# Altium PCB PCB1.PcbDoc
Units mm, origin at the board's own origin, x right, y up, seen from the top; angles counter-clockwise.
Board outline 68.06 x 85.84 mm, 2 copper layers (Top Layer, Bottom Layer); 11 components, 14 nets, 81 pads, 0 vias.
Unrouted connection lines stored in the file: 3.
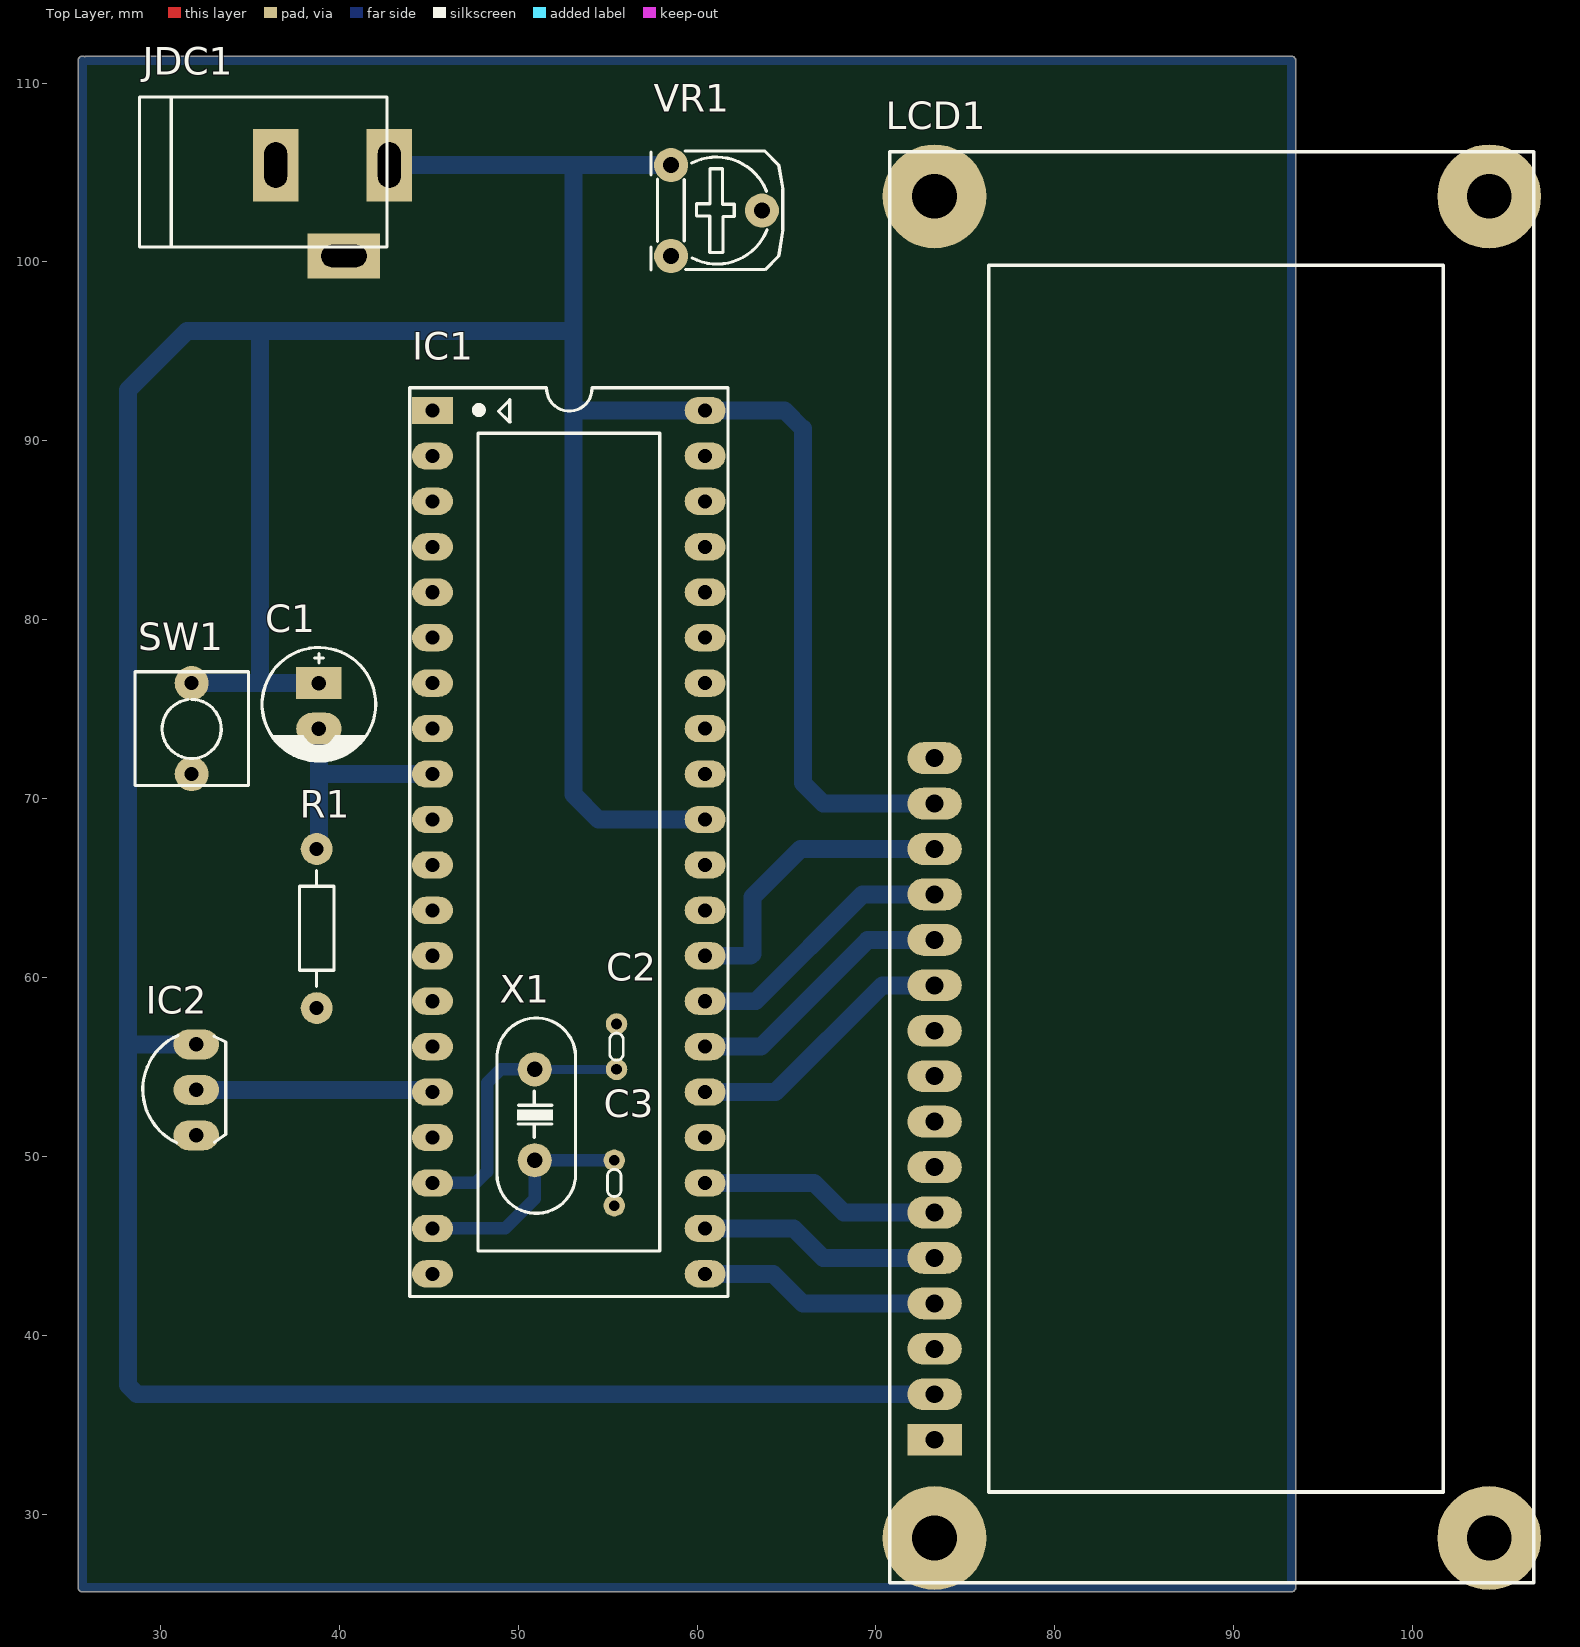
[diagram p0: Top Layer view]
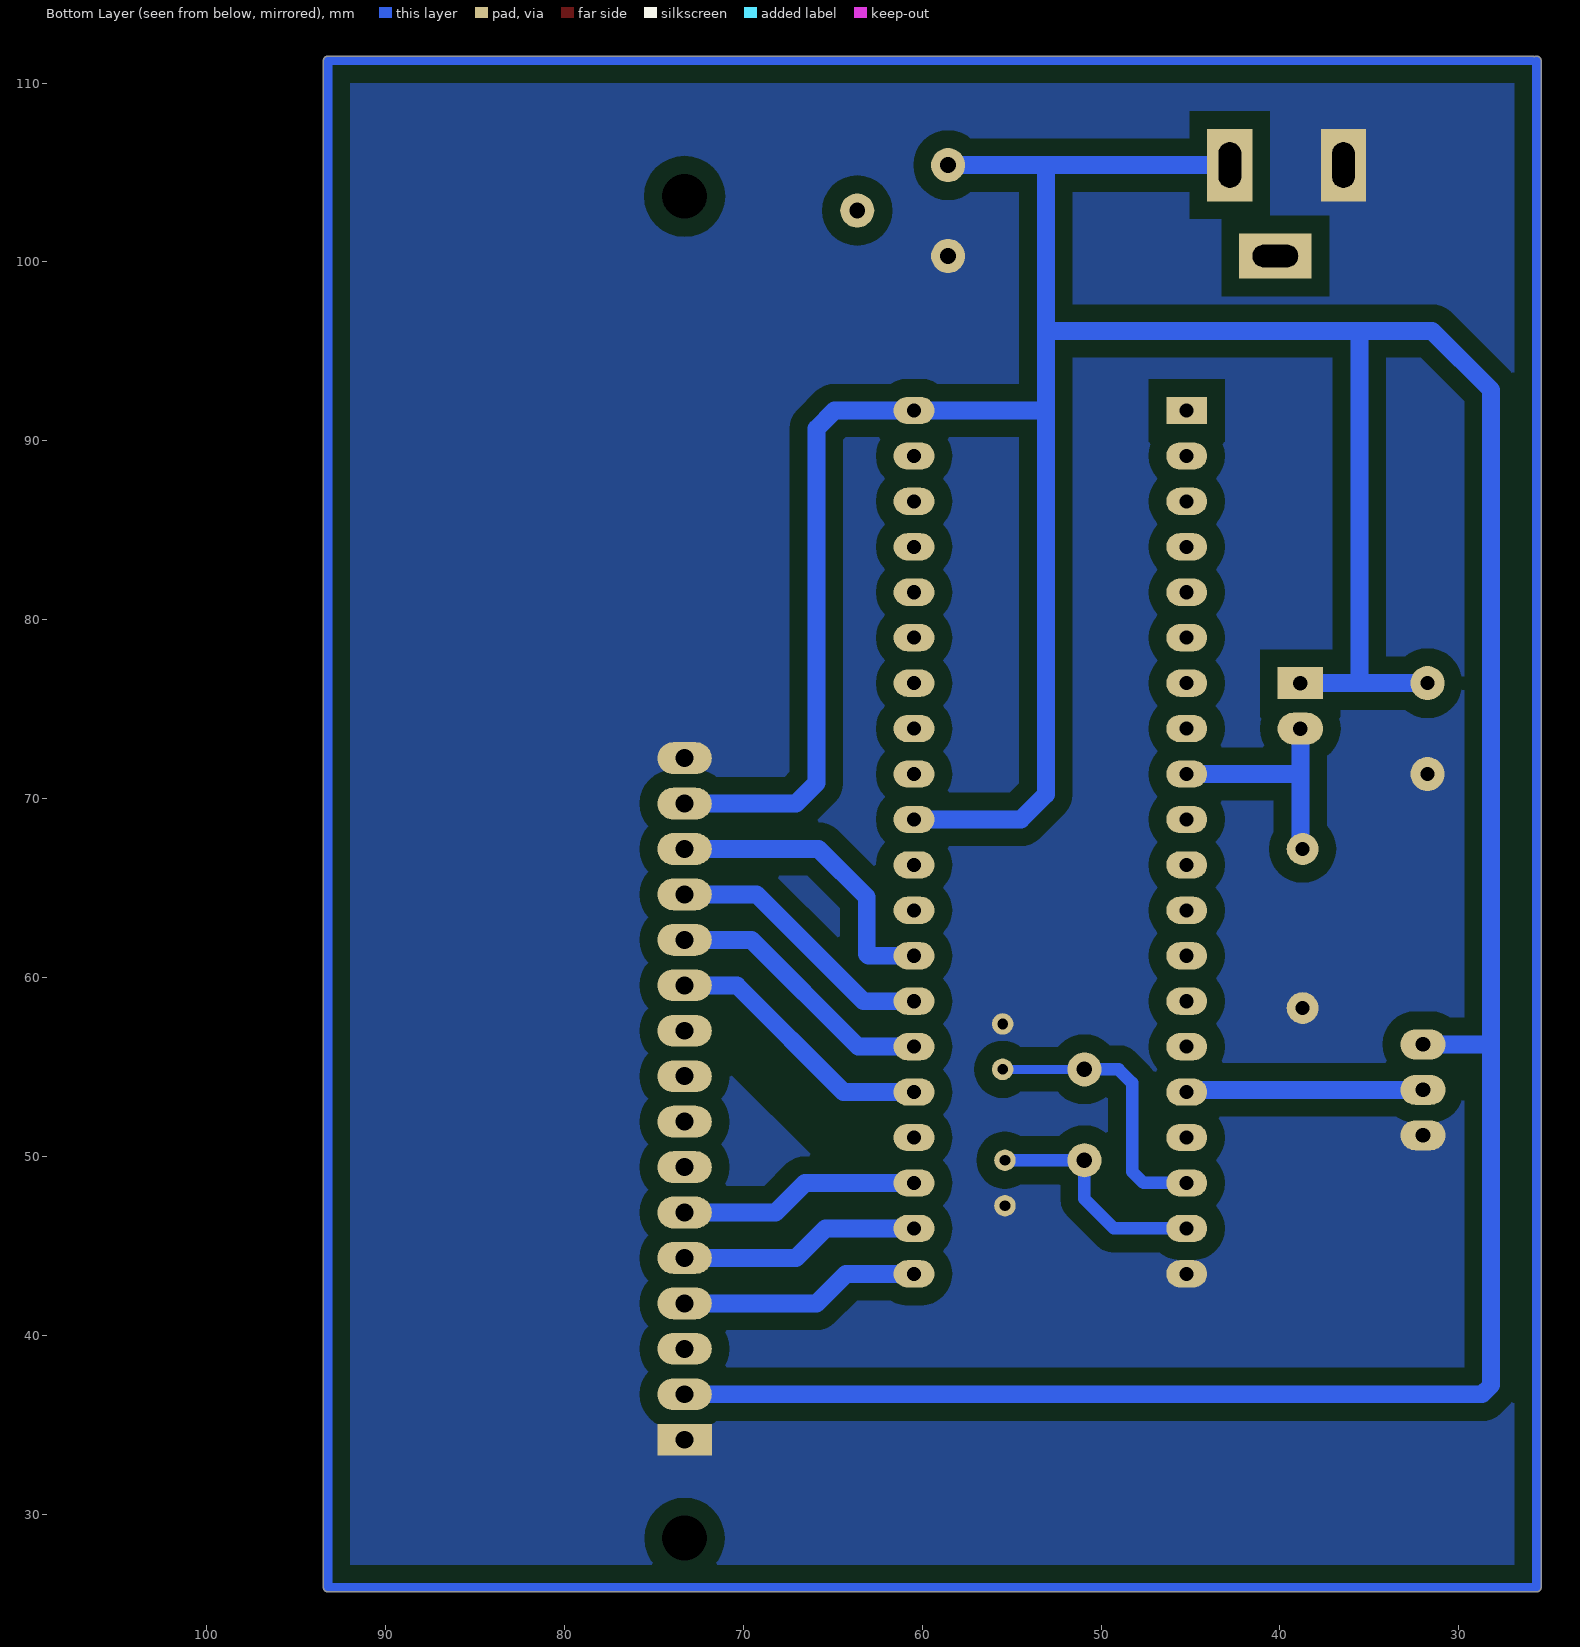
[diagram p1: Bottom Layer view, seen from below]
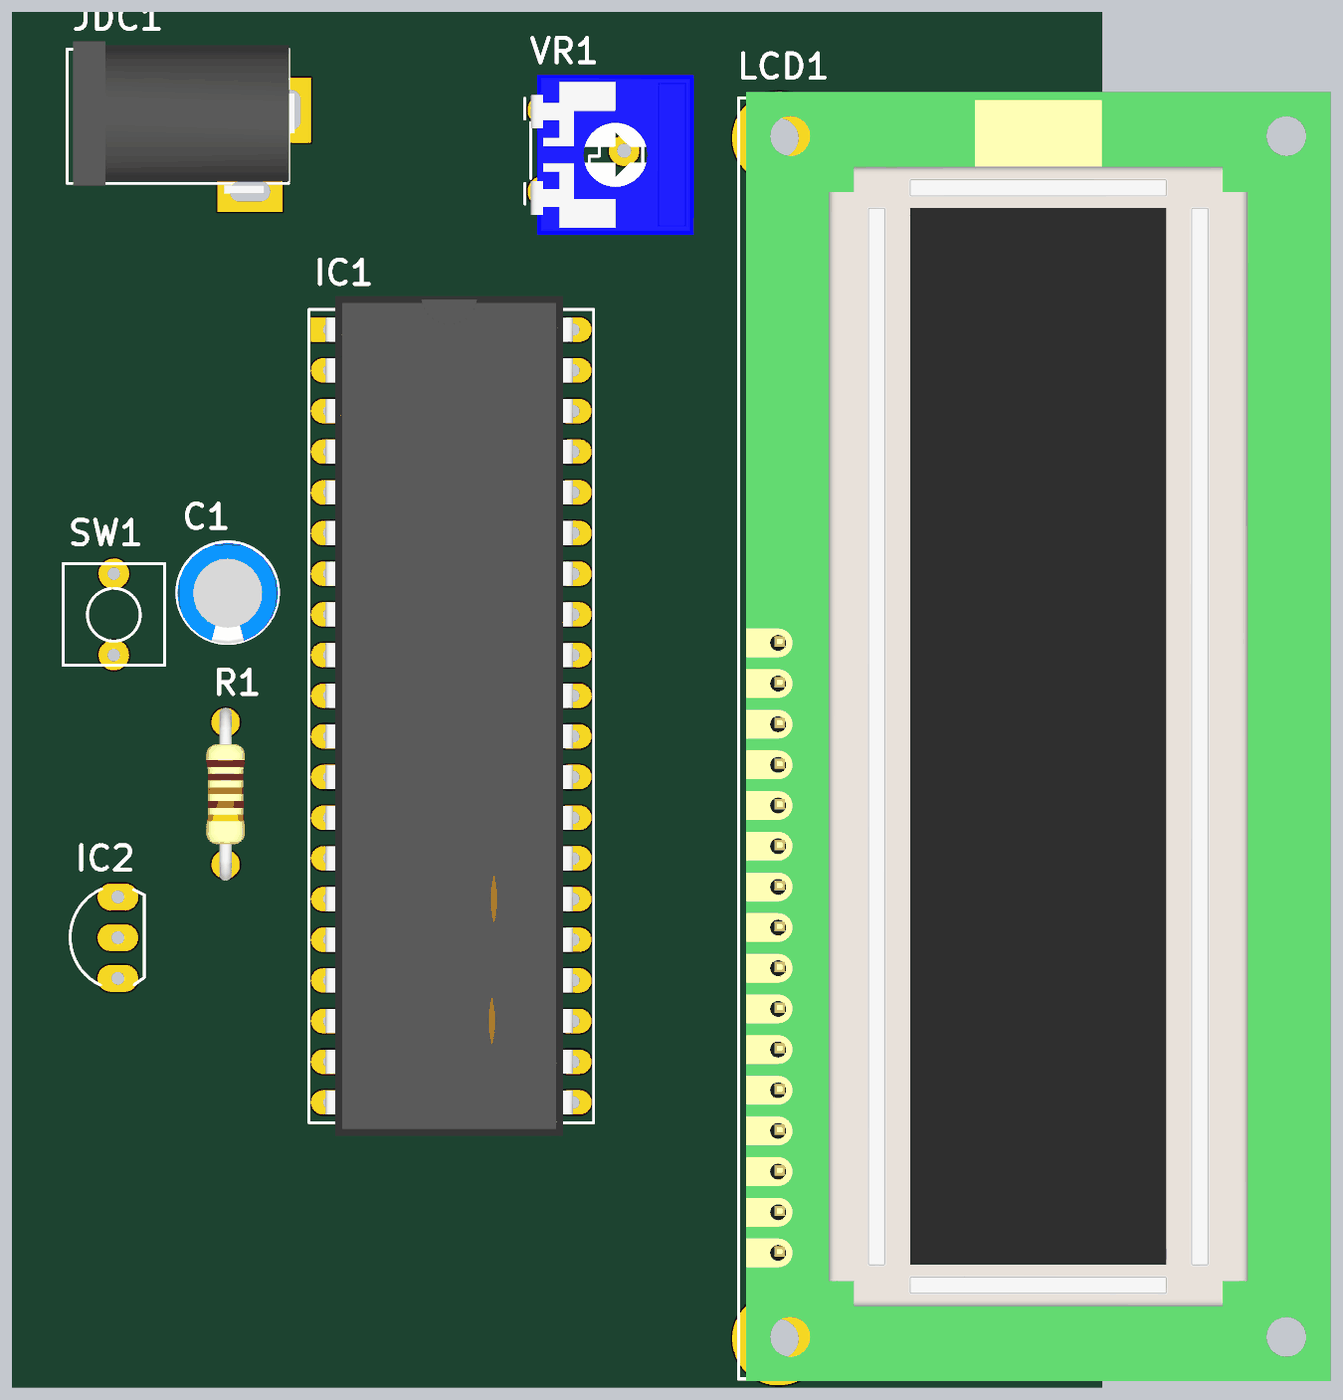
[diagram p2: 3D render of the assembled board from above, using the file's embedded part models]

## Layer stack, top to bottom
Top Solder: solder mask 0.0102, Solder Resist, Dk 3.5
Top Layer: signal copper 0.0356
Dielectric 1: dielectric 0.32, FR-4, Dk 4.8
Bottom Layer: signal copper 0.0356
Bottom Solder: solder mask 0.0102, Solder Resist, Dk 3.5

## Board outline
25.654,25.658 cw(c25.654,25.908) 25.404,25.908 25.404,111.252 cw(c25.654,111.252) 25.781,111.468 cw(c25.908,111.252) 25.908,111.502 93.218,111.502 cw(c93.218,111.252) 93.468,111.252 93.468,25.908 cw(c93.218,25.908) 93.218,25.658

## Design rules (kind name [scope] priority, off if disabled: settings)
Clearance [All] p1: gap=1 ignorepadtopadclearanceinfootprint=FALSE
PlaneClearance [All] p1: clearance=0.7
PlaneConnect [All] p1: planeconnectstyle=Direct reliefexpansion=0.508 reliefentries=4 reliefconductorwidth=0.254 reliefairgap=0.254
PolygonConnect [All] p1: connectstyle=Direct reliefconductorwidth=0.254 reliefentries=4 polygonreliefangle="90 Angle" airgapwidth=0.254
RoomDefinition Sheet1 [InComponentClass('Sheet1')] p1: confinementstyle=ConfineIn formatcopy=TRUE lockcomponents=FALSE outline 0,0 50.8,0 50.8,25.4 0,25.4
RoutingLayers [All] p1: top layer_v5=FALSE bottom layer_v5=TRUE
RoutingVias [All] p1: holewidth=0.711 width=1.27 viastyle="Through Hole" minholewidth=0.711 minwidth=1.27 maxholewidth=0.711 maxwidth=1.27
SolderMaskExpansion [All] p1: expansion=0.102
Width [All] p1: maxlimit=1 minlimit=0.5 preferedwidth=1
27 further rules are at their usual default settings.

## Components (designator, comment, footprint, x,y, rotation, side; value= is the part's Value field where it differs from the comment)
C1 "Cap Pol3" CP1/2.5 38.862,76.454 r270 top value=1000pF/35V
C2 "Capacitor Ceramic" Tu-pico 55.499,57.404 r270 top value=33p
C3 "Capacitor Ceramic" Tu-pico 55.372,47.244 r90 top value=33p
IC1 "AT89S52" DIP40/W0.6 45.212,91.694 r270 top
IC2 "DS18S20" DS18S20 32.004,53.721 r90 top
JDC1 "Jac DC" DC-IN 39.624,102.87 r0 top
LCD1 "LCD16x2A" LCD16X2 73.279,34.163 r90 top
R1 "1k" R1/4W 38.735,58.293 r90 top value="R1/4W - 1K"
SW1 "SW" SW2 31.75,71.374 r90 top value="SW chip 2 pin"
VR1 "10K" VR 58.547,105.41 r270 top value="VR 10K"
X1 "4Mhz" XT2 50.927,52.324 r270 top

## Footprints (in the part's own frame and the unit in brackets; to place one, negate y for a bottom-side part, rotate by r counter-clockwise, add the part's x,y. Pads: shape width x height; smd on the part's side, far side on the other; paste and mask are expansions set on the pad)
CP1/2.5 [mil] "Tu hoa 33 >100 uF,50V, 220uF/16V,25V"
  rect 70x100 hole 32: 1(0,0)
  oval 70x100 hole 32: 2(100,0)
  silkscreen extent -78,-125 172,125, body extent -76,-124 172,124, height 422
DC-IN [mil] "Jac DC input"
  rect 100x160 hole 50 slot 100 at 90 deg: 1(125,100) 2(-125,100)
  rect 160x100 hole 50 slot 100 at 0 deg: 3(25,-100)
  silkscreen extent -425,-80 120,250, body extent -410,-105 134,269, height 434
DIP40/W0.6 [mil] "40 PIN, W 600mil, Pin to pin 100mil"
  rect 60x90 hole 31: 1(0,0)
  oval 60x90 hole 31: 2(100,0) 3(200,0) 4(300,0) 5(400,0) 6(500,0) 7(600,0) 8(700,0) 9(800,0) 10(900,0) 11(1000,0) 12(1100,0) 13(1200,0) 14(1300,0) 15(1400,0) 16(1500,0) 17(1600,0) 18(1700,0) 19(1800,0) 20(1900,0) 21(1900,600) 22(1800,600) 23(1700,600) 24(1600,600) 25(1500,600) 26(1400,600) 27(1300,600) 28(1200,600) 29(1100,600) 30(1000,600) 31(900,600) 32(800,600) 33(700,600) 34(600,600) 35(500,600) 36(400,600) 37(300,600) 38(200,600) 39(100,600) 40(0,600)
  silkscreen extent -50,-50 1950,650, body extent -82,-10 1982,600, height 224
DS18S20 [mil] "TO-92"
  oval 66x100 hole 32: 3(100,0) 4(0,0) 5(-100,0)
  silkscreen extent -117,-65 120,118
LCD16X2 [mm] "LCD dipslay 16x2, 16 pin"
  rect 1.778x3.048 hole 1: 1(0,0)
  oval 1.778x3.048 hole 1: 2(2.54,0) 3(5.08,0) 4(7.62,0) 5(10.16,0) 6(12.7,0) 7(15.24,0) 8(17.78,0) 9(20.32,0) 10(22.86,0) 11(25.4,0) 12(27.94,0) 13(30.48,0) 14(33.02,0) 15(35.56,0) 16(38.1,0)
  round 5.8 / inner round 0 / far side round 0 hole 2.5 unplated: M1(-5.5,0) M2(69.5,0) M3(-5.5,-31) M4(69.5,-31)
  silkscreen extent -8,-33.5 72,2.5, body extent -8.13,-34.47 72.37,2.03, height 18.14
R1/4W [mil] "R 1/4W, 2 Pin, 350mil"
  round 70 hole 31: 1(0,0) 2(350,0)
  silkscreen extent 48,-38 302,38, body extent -40,-47 386,47, height 111
SW2 [mil] "SW button 2pin, 250x 250 mil"
  round 75 hole 31: 1(0,0) 2(200,0)
  silkscreen extent -25,-125 225,125
Tu-pico [mm] "Tu gom mini"
  round 1.2 hole 0.6: 1(0,0) 2(2.54,0)
  silkscreen extent 0.51,-0.38 2.03,0.38, body extent -1.65,-0.85 4.19,0.85, height 6.12
VR [mil] "Resistor Variable"
  round 75 hole 35: 1(0,0) 2(100,200) 3(200,0)
  silkscreen extent -31,-44 231,246, body extent -87,-30 307,372, height 165
XT2 [mil] "Footpin for Crystal 2 pin"
  round 75 hole 34: 1(-100,0) 2(100,0)
  silkscreen extent -213,-83 217,90, body extent -216,-87 216,90, height 144

## Part data
C1: "Polarized Capacitor (Surface Mount)", LatestRevisionDate=17-Jul-2002, LatestRevisionNote="Re-released for DXP Platform.", PackageReference=C0805, Publisher="Altium Limited"
C2 C3: library part CapCeramic, "Capacitor", LatestRevisionDate=17-Jul-2002, LatestRevisionNote="Re-released for DXP Platform.", PackageReference=RAD-0.3, Published=8-Jun-2000, Publisher="Altium Limited"
IC1: "AT89S52, 8k Byte Flash Memory , 40 Pin"
IC2: "High Precision  1-Wire® Digital Thermometer"
JDC1: library part DCIN, "Jac DC input"
LCD1: library part LCD16x2, "LCD dipslay 16 char, 2 line"
R1: library part R1/4W, "Resistor 1/4W"
SW1: library part SW2, "Switch button 2 pin"
VR1: library part VR, "Var Resistor"
X1: library part XT2, "Crystal For all Crystal 2pin."

## Nets (pads, with @x,y where several pads share a name; then routed paths per layer and width w, separated by ;. In a path a pad name is that pad's centre, name@x,y a point inside that pad or via, vN(x,y) a via of type N, cw(c..) or ccw(c..) an arc to the next point about the centre after c; other vN are vias at no path point)
GND: C2.1 C3.1 IC1.20 IC2.5 JDC1.2 LCD1.1 LCD1.16 R1.1 SW1.1 VR1.3
NetC2_2: C2.2 IC1.18 X1.1 | length 15.8
  Bottom Layer w0.5: X1.1 C2.2
  Bottom Layer w0.7: IC1.18 47.625,48.514 48.26,49.149 48.26,54.102 49.022,54.864 X1.1
NetC3_2: C3.2 IC1.19 X1.2 | length 13
  Bottom Layer w0.7: IC1.19 49.276,45.974 50.927,47.625 X1.2 C3.2
NetIC1_16: IC1.16 IC2.4 | length 13.3
  Bottom Layer w1: IC2.4 45.085,53.721 IC1.16
NetIC1_21: IC1.21 LCD1.4 | length 13.5
  Bottom Layer w1: IC1.21 64.262,43.434 65.913,41.783 LCD1.4
NetIC1_22: IC1.22 LCD1.5 | length 13.5
  Bottom Layer w1: IC1.22 65.405,45.974 67.056,44.323 LCD1.5
NetIC1_23: IC1.23 LCD1.6 | length 13.5
  Bottom Layer w1: IC1.23 66.548,48.514 68.199,46.863 LCD1.6
NetIC1_25: IC1.25 LCD1.11 | length 15.3
  Bottom Layer w1: IC1.25 64.389,53.594 70.358,59.563 LCD1.11
NetIC1_26: IC1.26 LCD1.12 | length 13.9
  Bottom Layer w1: IC1.26 63.569,56.134 69.538,62.103 LCD1.12@71.882,62.103
NetIC1_27: IC1.27 LCD1.13 | length 13.9
  Bottom Layer w1: IC1.27 63.28,58.674 69.249,64.643 LCD1.13@71.882,64.643
NetIC1_28: IC1.28 LCD1.14 | length 15.8
  Bottom Layer w1: IC1.28 62.992,61.214 63.095,61.317 63.095,64.492 65.786,67.183 LCD1.14@71.882,67.183
NetLCD1_3: LCD1.3 VR1.2
RS: C1.2 IC1.9 R1.2 | length 13.1
  Bottom Layer w1: R1.2 38.862,67.31 38.862,71.374 ; C1.2 38.862,71.374 ; IC1.9 38.862,71.374
VCC: C1.1 IC1.31 IC1.40 IC2.3 JDC1.1 LCD1.2 LCD1.15 SW1.2 VR1.1 | length 254.8
  Bottom Layer w1: SW1.2 35.56,76.454 ; IC2.3 28.194,56.261 ; C1.1 35.56,76.454 ; JDC1.1 53.086,105.41 ; VR1.1 53.086,105.41 ; IC1.31 54.483,68.834 53.086,70.231 53.086,91.694 ; LCD1.2@71.882,36.703 28.702,36.703 28.194,37.211 28.194,56.261 ; LCD1.15@71.882,69.723 67.056,69.723 65.913,70.866 65.913,90.678 64.897,91.694 IC1.40 53.086,91.694 ; 28.194,56.261 28.194,92.837 31.496,96.139 35.433,96.139 ; 35.433,96.139 53.086,96.139 ; 35.433,96.139 35.56,96.012 35.56,76.454 ; 53.086,91.694 53.086,96.139 ; 53.086,96.139 53.086,105.41
pads on no net: IC1.1 IC1.2 IC1.3 IC1.4 IC1.5 IC1.6 IC1.7 IC1.8 IC1.10 IC1.11 IC1.12 IC1.13 IC1.14 IC1.15 IC1.17 IC1.24 IC1.29 IC1.30 IC1.32 IC1.33 IC1.34 IC1.35 IC1.36 IC1.37 IC1.38 IC1.39 JDC1.3 LCD1.7 LCD1.8 LCD1.9 LCD1.10 LCD1.M1 LCD1.M2 LCD1.M3 LCD1.M4
copper on no net: | length 305.6
  Bottom Layer w0.5: 25.654,111.252 25.654,25.908 93.218,25.908 93.218,111.252 25.908,111.252

## Polygon pours and split planes (outlines as drawn)
GND on Bottom Layer "Bottom Layer-GND" (solid, pour order 4): 93.218,111.252 93.218,25.908 25.654,25.908 25.654,110.998 25.908,111.252